# Altium PCB HW_V5.0.PcbDoc
Units mm, origin at the board's own origin, x right, y up, seen from the top; angles counter-clockwise.
Board outline 30 x 40 mm, 4 copper layers (Top Layer, Int1 (GND), MiddleLayer, Bottom Layer), stack 0.769 mm thick; 39 components, 33 nets, 221 pads, 86 vias.
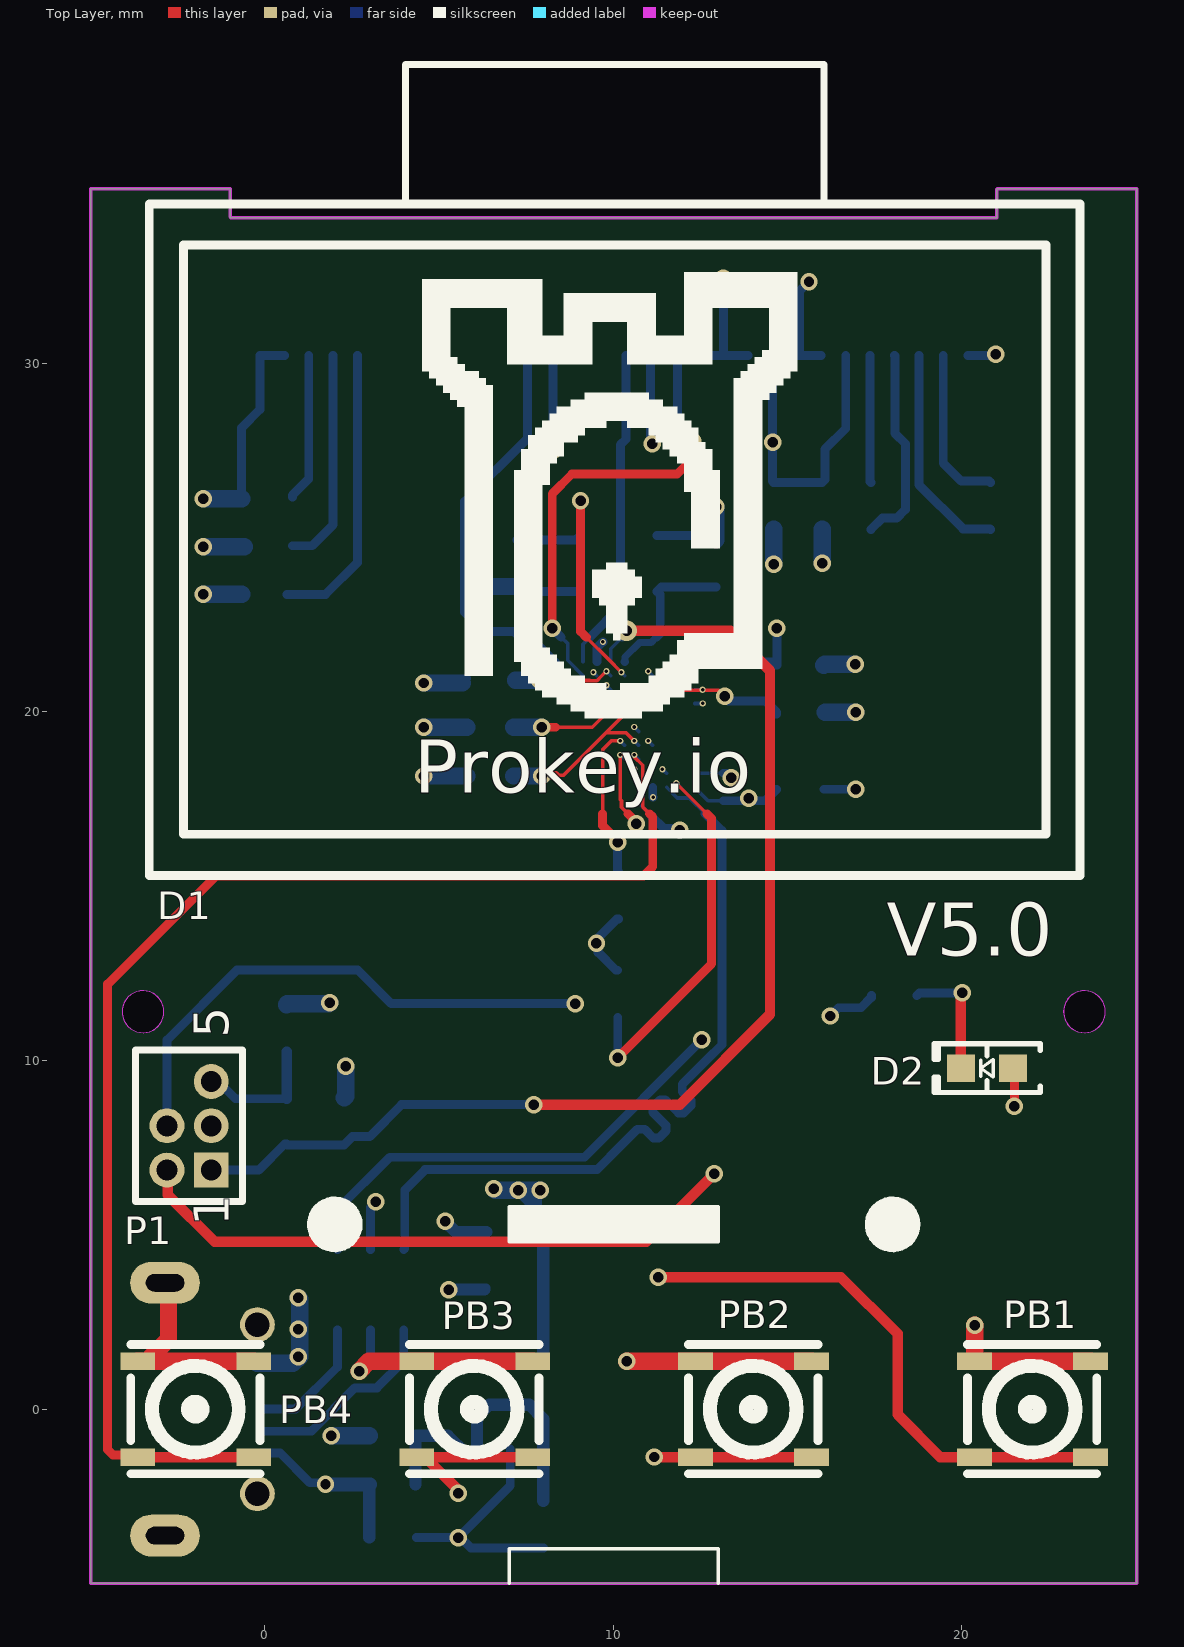
[diagram p0: Top Layer view]
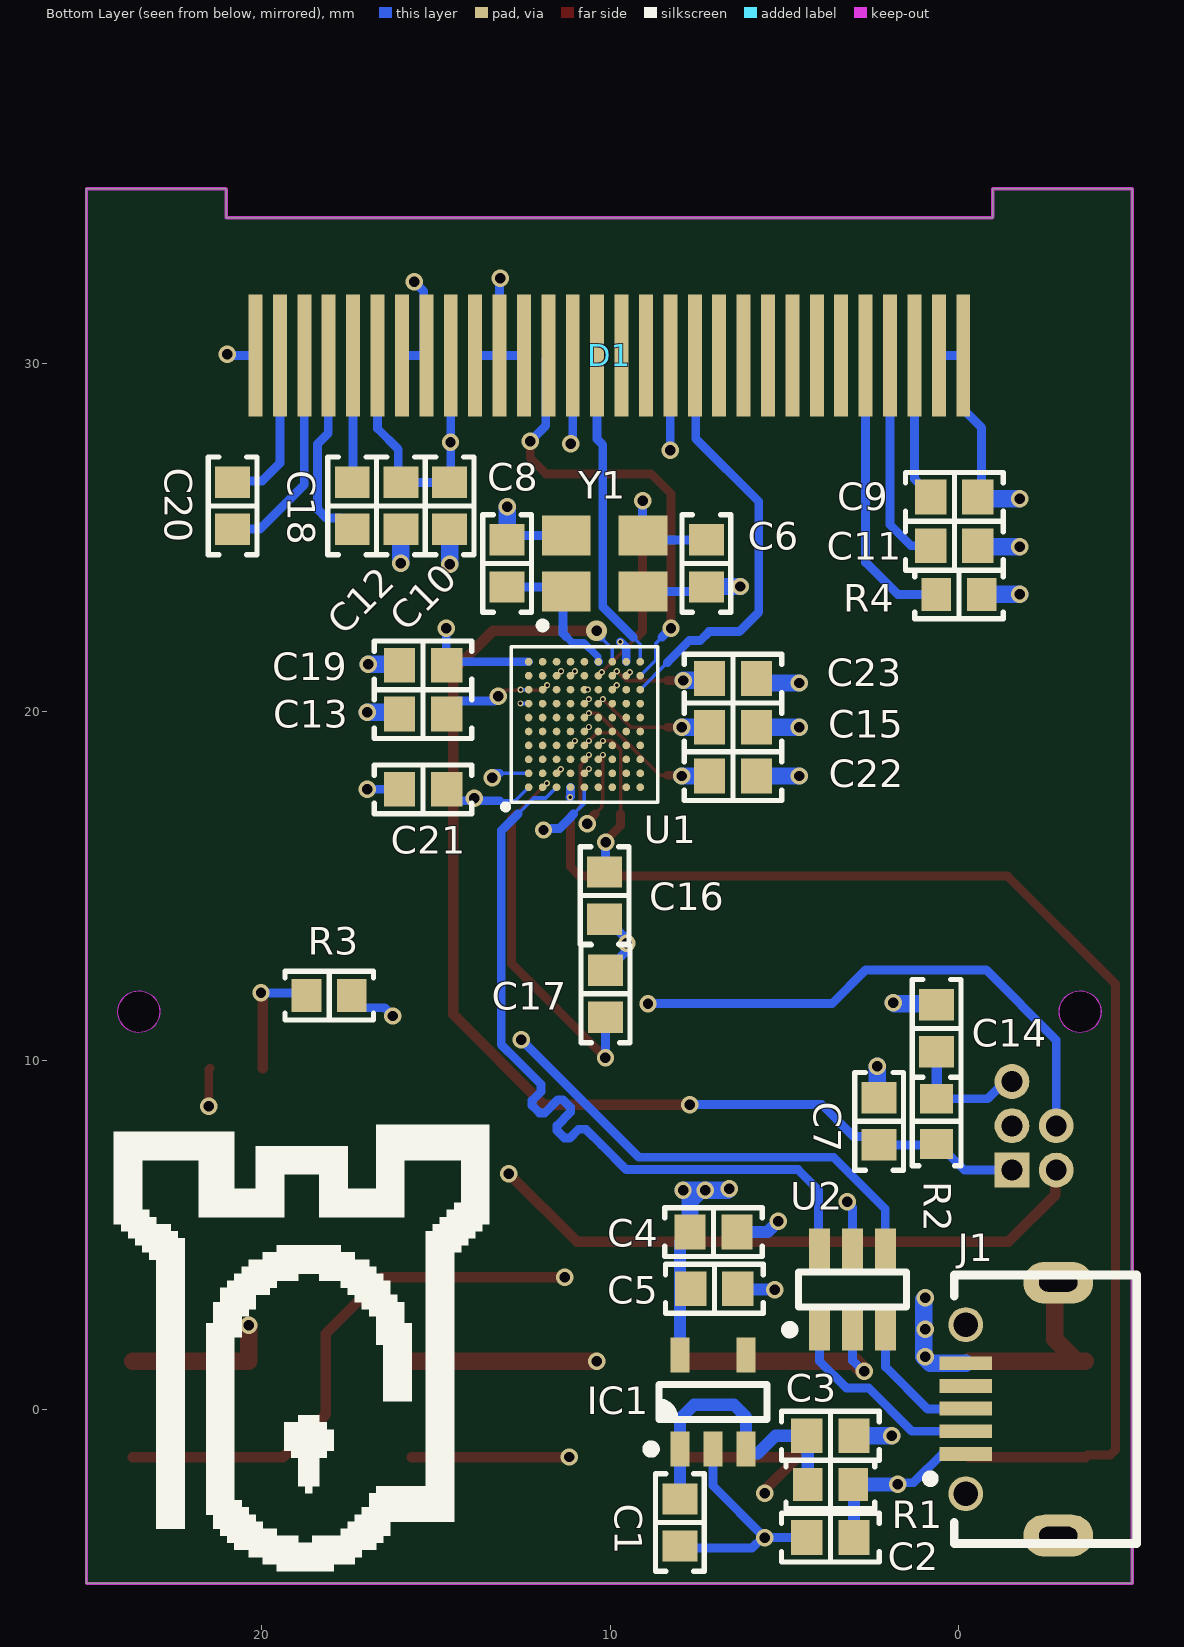
[diagram p1: Bottom Layer view, seen from below]
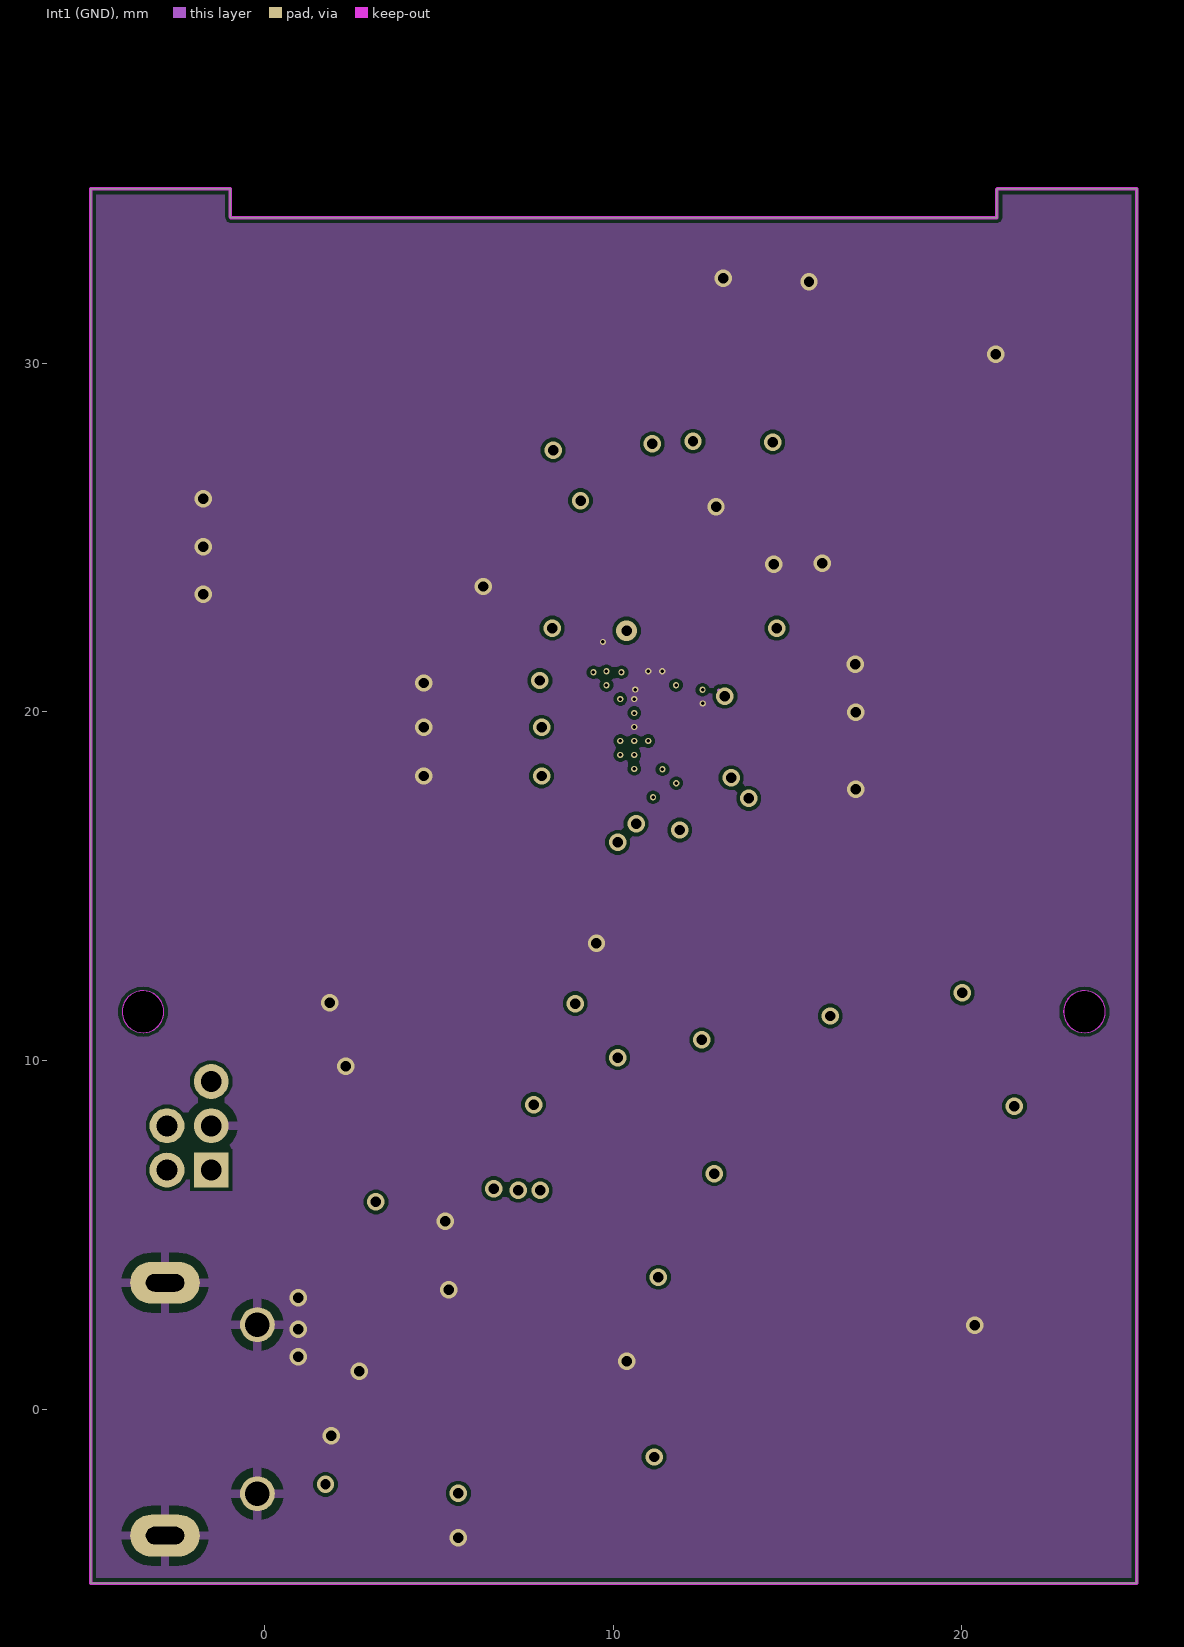
[diagram p2: Int1 (GND)]
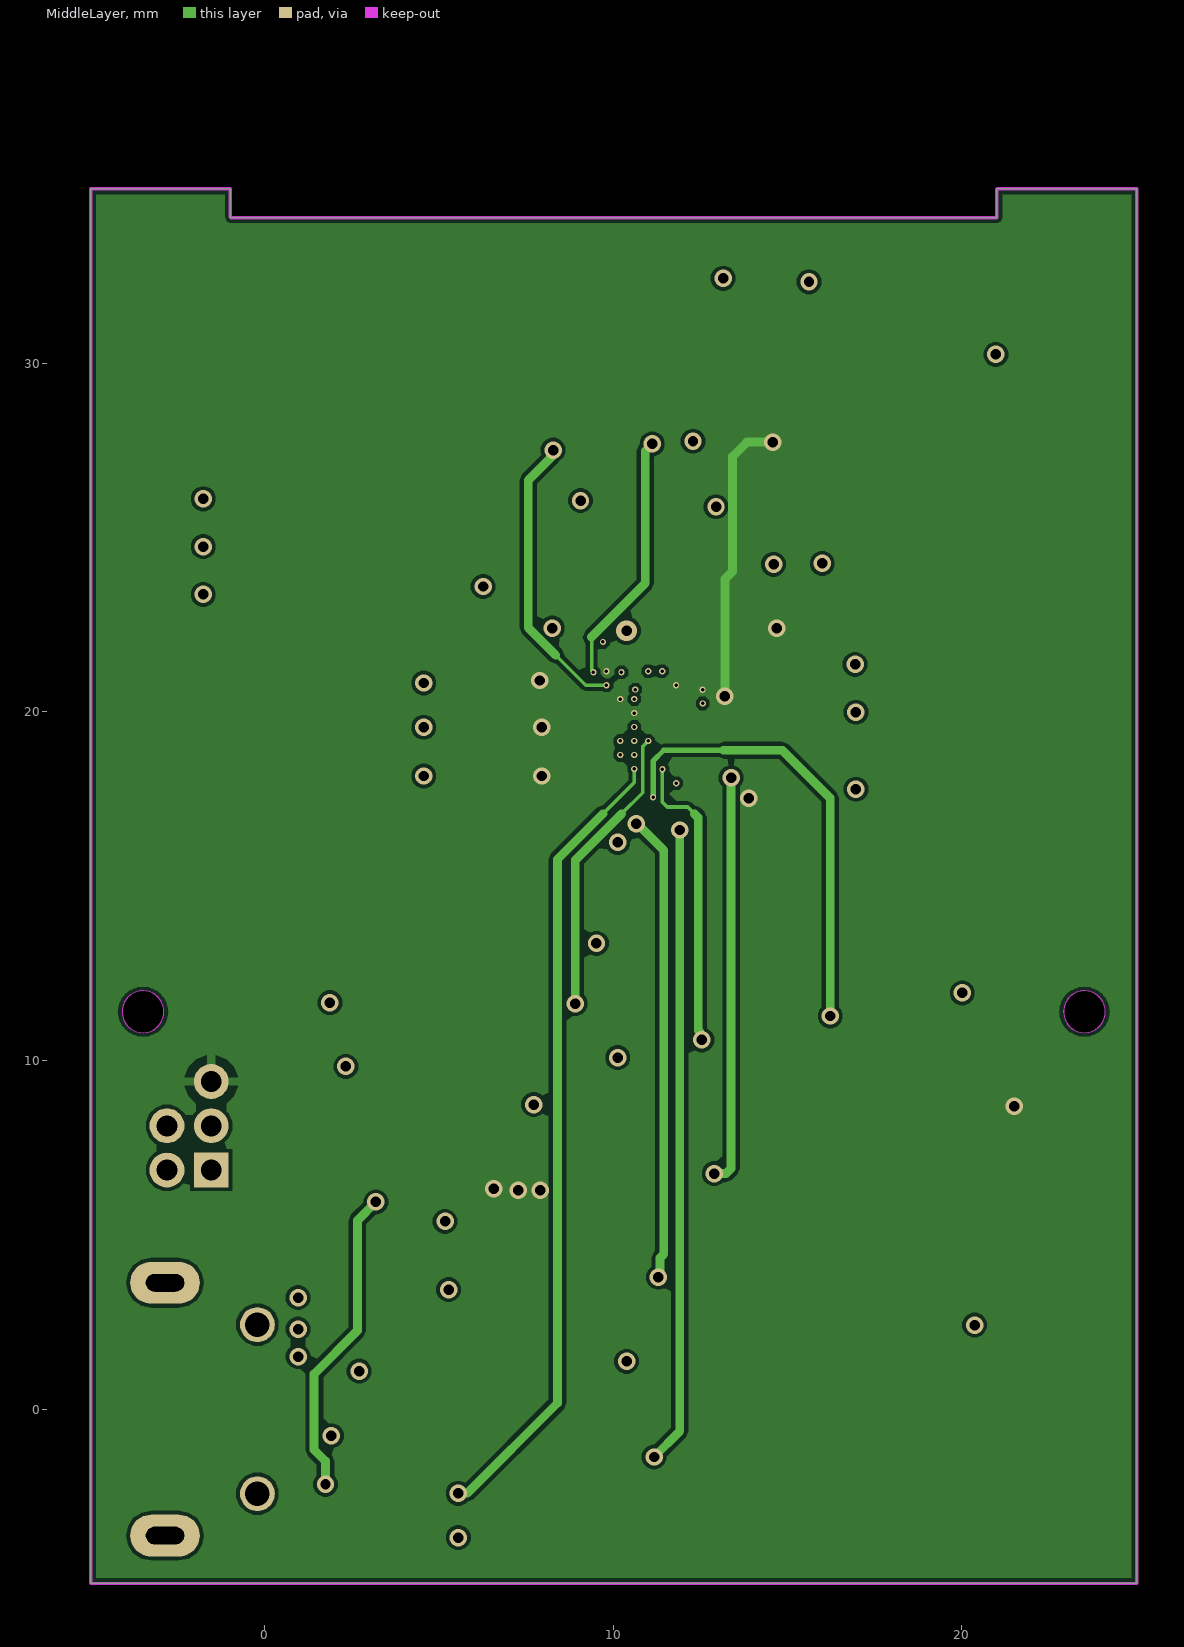
[diagram p3: MiddleLayer]
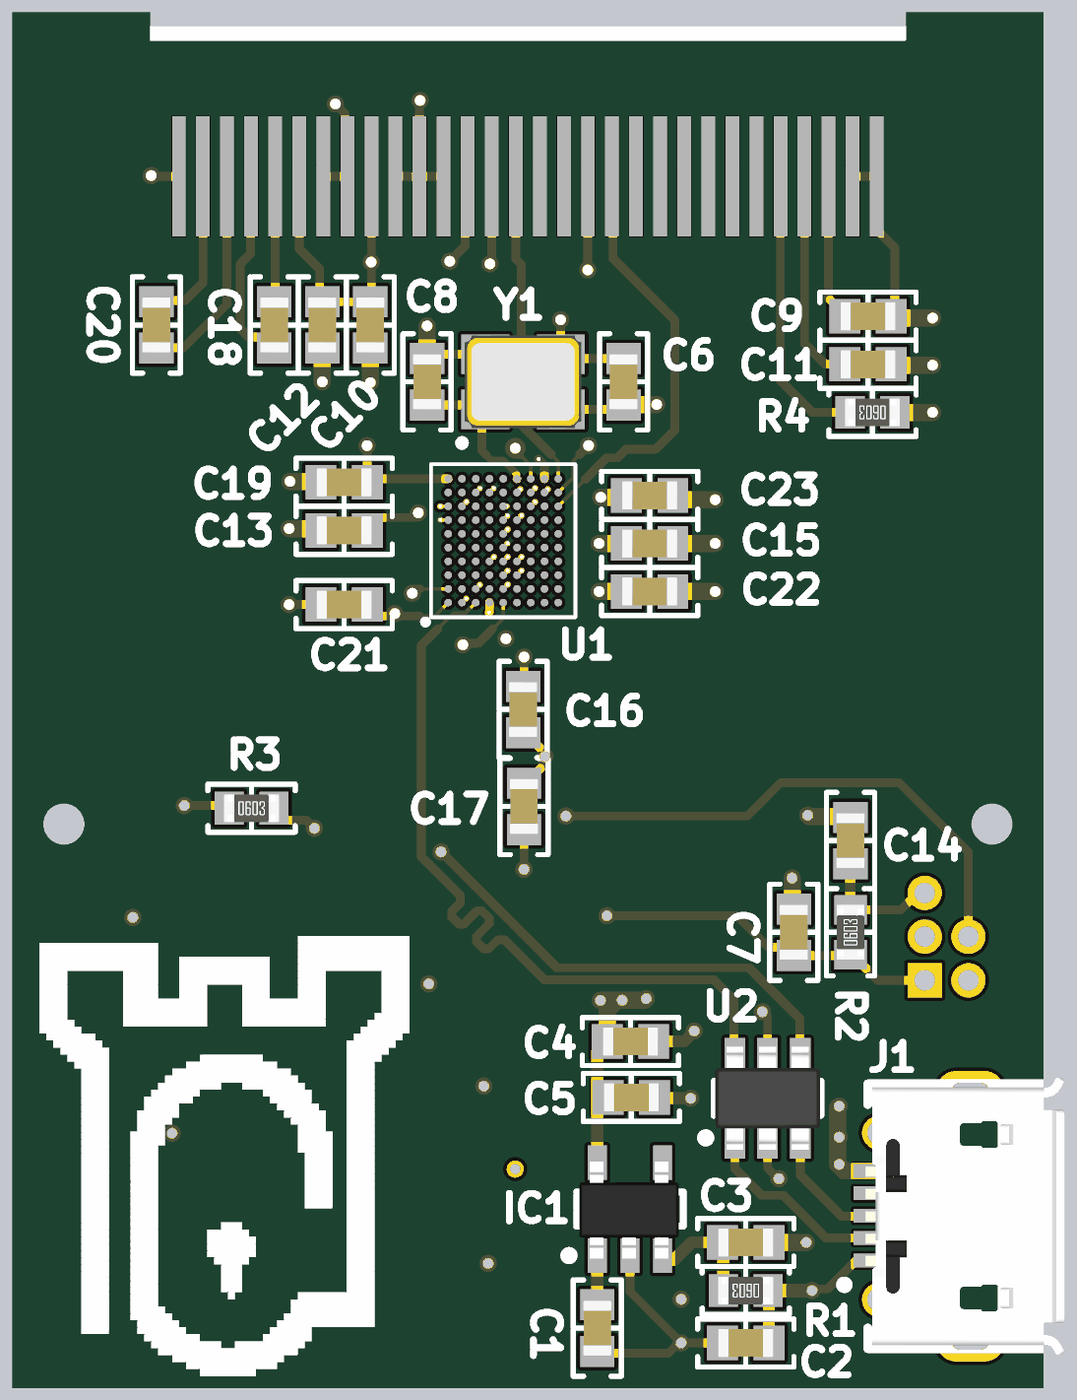
[diagram p4: 3D render of the assembled board from below, using the file's embedded part models]

## Layer stack, top to bottom
Top Solder: solder mask 0.0254, SM-001, Dk 4
Top Layer: signal copper 0.035
Dielectric 1: prepreg 0.1295, PP-017, Dk 4.3
Dielectric 2: prepreg 0.1295, PP-017, Dk 4.3
Int1 (GND): signal copper 0.035
Dielectric 3: core 0.1112, Core-039, Dk 4.8
MiddleLayer: signal copper 0.035
Dielectric 4: prepreg 0.1295, PP-017, Dk 4.3
Dielectric 5: prepreg 0.1295, PP-017, Dk 4.3
Bottom Layer: signal copper 0.035
Bottom Solder: solder mask 0.0254, SM-001, Dk 4

## Board outline
-0.98,34.195 -0.98,35 -4.98,35 -4.98,-5 25.02,-5 25.02,35 21.02,35 21.012,34.992 21.012,34.174 -0.959,34.174
cut-out: 22.92,11.4 ccw(c23.52,11.4) 23.52,10.8 ccw(c23.52,11.4) 24.12,11.4 ccw(c23.52,11.4) 23.52,12 ccw(c23.52,11.4)
cut-out: -4.08,11.4 ccw(c-3.48,11.4) -3.48,10.8 ccw(c-3.48,11.4) -2.88,11.4 ccw(c-3.48,11.4) -3.48,12 ccw(c-3.48,11.4)

## Design rules (kind name [scope] priority, off if disabled: settings)
Clearance BGA_Clearance [WithinRoom('BGA')] p1: gap=0.102 ignorepadtopadclearanceinfootprint=TRUE
Clearance [All] p2: gap=0.1 ignorepadtopadclearanceinfootprint=FALSE
FanoutControl Fanout_Default [All] p1: bgadir=NE bgaviamode=Closest fanoutstyle=Rows fanoutdirection=Alternating viagrid=0.025 // Fanout_Default (Default Rule)
HoleToHoleClearance [All] p1: gap=0.102 allowstackedmicrovias=TRUE
MinimumSolderMaskSliver [All] p1: minsoldermaskwidth=0
PlaneConnect [All] p1: pad.planeconnectstyle=Relief pad.reliefexpansion=0.508 pad.reliefentries=4 pad.reliefconductorwidth=0.254 pad.reliefairgap=0.254 via.planeconnectstyle=Direct via.reliefexpansion=0.508 via.reliefentries=4 via.reliefconductorwidth=0.254 via.reliefairgap=0.254
PolygonConnect [All] p1: thpad.connectstyle=Relief thpad.reliefconductorwidth=0.254 thpad.reliefentries=4 thpad.polygonreliefangle="90 Angle" thpad.airgapwidth=0.254 smdpad.connectstyle=Relief smdpad.reliefconductorwidth=0.254 smdpad.reliefentries=4 smdpad.polygonreliefangle="90 Angle" smdpad.airgapwidth=0.254 via.connectstyle=Direct via.reliefconductorwidth=0.254 via.reliefentries=4 via.polygonreliefangle="90 Angle" via.airgapwidth=0.254
RoomDefinition BGA [InComponentClass('Room Definition 1')] p1: confinementstyle=ConfineIn formatcopy=TRUE lockcomponents=FALSE outline 8.359,17.078 8.359,22.142 13.173,22.142 13.173,17.078
RoutingVias BGA_RoutingVias [WithinRoom('BGA')] p1: holewidth=0.102 width=0.178 viastyle="Through Hole" minholewidth=0.102 minwidth=0.178 maxholewidth=0.102 maxwidth=0.178
RoutingVias [All] p2: holewidth=0.5 width=1 viastyle="Through Hole" minholewidth=0.3 minwidth=0.5 maxholewidth=0.7 maxwidth=1.27
SilkToSilkClearance [All] p1: silktosilkclearance=0.05
SilkToSolderMaskClearance [IsPad] p1: minsilkscreentomaskgap=0.1 clearancetoexposedcopper=TRUE
SolderMaskExpansion [All] p1: expansion=0.102 istentingtop=FALSE
Width BGA_Width [WithinRoom('BGA')] p1: maxlimit=0.254 minlimit=0.102 preferedwidth=0.102
Width [All] p2: maxlimit=1.016 minlimit=0.254 preferedwidth=0.254
20 further rules are at their usual default settings.

## Components (designator, comment, footprint, x,y, rotation, side; value= is the part's Value field where it differs from the comment)
C1 "10uF" "CAP 0603/1608" 8.001,-3.251 r90 bottom
C2 "0.1uF" "CAP 0603/1608" 3.683,-3.683 r180 bottom
C3 "0.1uF" "CAP 0603/1608" 3.683,-0.762 r0 bottom
C4 "10uF" "CAP 0603/1608" 7.036,5.08 r0 bottom
C5 "0.1uF" "CAP 0603/1608" 7.01,3.454 r0 bottom
C6 "20pF" "CAP 0603/1608" 7.239,24.257 r90 bottom
C7 "0.1uF" "CAP 0603/1608" 2.286,8.255 r270 bottom
C8 "20pF" "CAP 0603/1608" 12.954,24.257 r270 bottom
C9 "2.2uF" "CAP 0603/1608" 0.127,26.162 r180 bottom
C10 "1uF" "CAP 0603/1608" 14.605,25.908 r90 bottom
C11 "4.7uF" "CAP 0603/1608" 0.127,24.765 r0 bottom
C12 "1uF" "CAP 0603/1608" 16.002,25.908 r270 bottom
C13 "0.1uF" "CAP 0603/1608" 15.367,19.939 r180 bottom
C14 "0.1uF" "CAP 0603/1608" 0.635,10.922 r270 bottom
C15 "0.1uF" "CAP 0603/1608" 6.477,19.558 r0 bottom
C16 "2.2uF" "CAP 0603/1608" 10.16,14.732 r90 bottom
C17 "2.2uF" "CAP 0603/1608" 10.135,11.913 r270 bottom
C18 "1uF" "CAP 0603/1608" 17.399,25.908 r90 bottom
C19 "0.1uF" "CAP 0603/1608" 15.367,21.336 r180 bottom
C20 "1uF" "CAP 0603/1608" 20.828,25.908 r270 bottom
C21 "0.1uF" "CAP 0603/1608" 15.367,17.78 r180 bottom
C22 "0.1uF" "CAP 0603/1608" 6.477,18.161 r0 bottom
C23 "0.1uF" "CAP 0603/1608" 6.477,20.955 r0 bottom
D1 "DLC0096DLOG-B" PMOLED_0096_TOP_CONB 23.358,34.544 r180 top locked
D2 "Red" "LED 0603/1608 RED" 20.726,9.779 r180 top value=Green
IC1 "TPS76333DBVT" "TI SOT-23-5 DBV" 7.051,0.207 r90 bottom
J1 "U-F-M5DD-W-L" U-F-M5DD-W-L -1.525,0 r0 bottom
P1 "MHDR2X3" MHDR2X3 -1.524,6.858 r90 top
PB1 "Tactile Switch 3.7 x 3.7" SW_375_375_4PIN 22.02,0 r90 top locked
PB2 "Tactile Switch 3.7 x 3.7" SW_375_375_4PIN 14.02,0 r90 top locked
PB3 "Tactile Switch 3.7 x 3.7" SW_375_375_4PIN 6.02,0 r90 top locked
PB4 "Tactile Switch 3.7 x 3.7" SW_375_375_4PIN -1.98,0 r90 top locked
R1 "1R" "RES 0603/1608" 3.683,-2.159 r0 bottom
R2 "1K" "RES 0603/1608" 0.635,8.255 r90 bottom
R3 "330R" "RES 0603/1608" 18.059,11.862 r180 bottom
R4 "910K" "RES 0603/1608" -0.003,23.368 r0 bottom
U1 "STM32F405OGY" STM-WLCSP90 10.738,19.638 r90 bottom
U2 "USBLC6-SC6" "ST SOT-23-6" 3.048,3.429 r90 bottom
Y1 "8MHz" WE-XTAL_CFPX-180 10.16,24.257 r180 bottom

## Footprints (in the part's own frame and the unit in brackets; to place one, negate y for a bottom-side part, rotate by r counter-clockwise, add the part's x,y. Pads: shape width x height; smd on the part's side, far side on the other; paste and mask are expansions set on the pad)
"CAP 0603/1608" [mm] "Chip Capacitor, 2-Leads, Body 1.60x0.80mm, IPC Medium Density"
  rect 0.9x1 smd: 1(-0.675,0) 2(0.675,0)
  silkscreen extent -1.4,-0.7 1.4,0.7, body extent -0.8,-0.41 0.8,0.41, height 0.82
"LED 0603/1608 RED" [mm] "Chip Diode, 2-Leads, Body 1.60x0.80mm, IPC Medium Density"
  rect 0.8x0.8 smd: 1(-0.75,0) 2(0.75,0)
  silkscreen extent -1.52,-0.7 1.52,0.7, body extent -0.8,-0.4 0.8,0.4, height 0.53
MHDR2X3 [mm] "Connector; Header; 3x2 Position"
  rect 1x1 hole 0.6: 1(0,0)
  round 1 hole 0.6: 2(0,1.27) 3(1.27,0) 4(1.27,1.27) 5(2.54,0)
  silkscreen extent -0.9,-0.9 3.44,2.17
PMOLED_0096_TOP_CONB [mm]
  rect 0.4x3.5 smd far side paste+0 mask+0.02: 1(3.185,4.318) 2(3.885,4.318) 3(4.585,4.318) 4(5.285,4.318) 5(5.985,4.318) 6(6.685,4.318) 7(7.385,4.318) 8(8.085,4.318) 9(8.785,4.318) 10(9.485,4.318) 11(10.185,4.318) 12(10.885,4.318) 13(11.585,4.318) 14(12.285,4.318) 15(12.985,4.318) 16(13.685,4.318) 17(14.385,4.318) 18(15.085,4.318) 19(15.785,4.318) 20(16.485,4.318) 21(17.185,4.318) 22(17.885,4.318) 23(18.585,4.318) 24(19.285,4.318) 25(19.985,4.318) 26(20.685,4.318) 27(21.385,4.318) 28(22.085,4.318) 29(22.785,4.318) 30(23.485,4.318)
  silkscreen extent -0.04,-4.02 26.66,19.24, body extent -0.08,-0.05 26.62,19.21, height 1.6
"RES 0603/1608" [mm] "Chip Resistor, 2-Leads, Body 1.60x0.80mm, IPC Medium Density"
  rect 0.85x0.95 smd: 1(-0.65,0) 2(0.65,0)
  silkscreen extent -1.27,-0.7 1.27,0.7, body extent -0.8,-0.4 0.8,0.4, height 0.45
"ST SOT-23-6" [mm] "SOT23, 6-Leads, Body 2.93x2.80mm, Pitch 0.95mm, IPC Medium Density"
  rect 1.2x0.6 smd: 1(-1.15,0.95) 2(-1.15,0) 3(-1.15,-0.95) 4(1.15,-0.95) 5(1.15,0) 6(1.15,0.95)
  silkscreen extent -1.27,-1.55 0.5,1.93, body extent -1.5,-1.53 1.5,1.52, height 1.45
STM-WLCSP90 [mm] "BGA, 90-Leads, Body 3.97x4.22mm, Pitch 0.4mm"
  round 0.22 smd: A1(-1.8,1.6) A2(-1.4,1.6) A3(-1,1.6) A4(-0.6,1.6) A5(-0.2,1.6) A6(0.2,1.6) A7(0.6,1.6) A8(1,1.6) A9(1.4,1.6) A10(1.8,1.6) B1(-1.8,1.2) B2(-1.4,1.2) B3(-1,1.2) B4(-0.6,1.2) B5(-0.2,1.2) B6(0.2,1.2) B7(0.6,1.2) B8(1,1.2) B9(1.4,1.2) B10(1.8,1.2) C1(-1.8,0.8) C2(-1.4,0.8) C3(-1,0.8) C4(-0.6,0.8) C5(-0.2,0.8) C6(0.2,0.8) C7(0.6,0.8) C8(1,0.8) C9(1.4,0.8) C10(1.8,0.8) D1(-1.8,0.4) D2(-1.4,0.4) D3(-1,0.4) D4(-0.6,0.4) D5(-0.2,0.4) D6(0.2,0.4) D7(0.6,0.4) D8(1,0.4) D9(1.4,0.4) D10(1.8,0.4) E1(-1.8,0) E2(-1.4,0) E3(-1,0) E4(-0.6,0) E5(-0.2,0) E6(0.2,0) E7(0.6,0) E8(1,0) E9(1.4,0) E10(1.8,0) F1(-1.8,-0.4) F2(-1.4,-0.4) F3(-1,-0.4) F4(-0.6,-0.4) F5(-0.2,-0.4) F6(0.2,-0.4) F7(0.6,-0.4) F8(1,-0.4) F9(1.4,-0.4) F10(1.8,-0.4) G1(-1.8,-0.8) G2(-1.4,-0.8) G3(-1,-0.8) G4(-0.6,-0.8) G5(-0.2,-0.8) G6(0.2,-0.8) G7(0.6,-0.8) G8(1,-0.8) G9(1.4,-0.8) G10(1.8,-0.8) H1(-1.8,-1.2) H2(-1.4,-1.2) H3(-1,-1.2) H4(-0.6,-1.2) H5(-0.2,-1.2) H6(0.2,-1.2) H7(0.6,-1.2) H8(1,-1.2) H9(1.4,-1.2) H10(1.8,-1.2) J1(-1.8,-1.6) J2(-1.4,-1.6) J3(-1,-1.6) J4(-0.6,-1.6) J5(-0.2,-1.6) J6(0.2,-1.6) J7(0.6,-1.6) J8(1,-1.6) J9(1.4,-1.6) J10(1.8,-1.6)
  silkscreen extent -2.44,-2.1 2.23,2.34, body extent -2.11,-1.98 2.11,1.98, height 0.62
SW_375_375_4PIN [mm]
  rect 0.5x1 smd: 1(1.372,1.651) 2(-1.375,1.651) 3(-1.375,-1.676) 4(1.372,-1.676)
  silkscreen extent -1.85,-1.85 1.85,1.85
"TI SOT-23-5 DBV" [mm] "SOT23, 5-Leads, Body 2.90x2.80mm, Pitch 0.95mm, IPC Medium Density"
  rect 1x0.55 smd: 1(-1.35,0.95) 2(-1.35,0) 3(-1.35,-0.95) 4(1.35,-0.95) 5(1.35,0.95)
  silkscreen extent -1.47,-1.55 0.5,1.9, body extent -1.44,-1.42 1.39,1.48, height 1.5
U-F-M5DD-W-L [mm]
  rect 1.5x0.4 smd paste+0 mask+0.076: 1(1.325,1.283) 2(1.325,0.633) 3(1.325,-0.017) 4(1.325,-0.667) 5(1.325,-1.317)
  oval 2x1.2 hole 0.5 slot 1.1 at 0 deg: 6(-1.325,-3.625) 6(-1.325,3.625)
  round 1 hole 0.7: 6(1.325,-2.425) 6(1.325,2.425)
  silkscreen extent -3.58,-3.85 2.45,3.85, body extent -4.08,-4.02 1.72,4.03, height 2.72
WE-XTAL_CFPX-180 [mm] "Quartz Crystal, size CFPX-180, body 3.4x2.7mm"
  rect 1.4x1.15 smd: 1(-1.1,-0.8) 2(1.1,-0.8) 3(1.1,0.8) 4(-1.1,0.8)
  silkscreen extent -1.88,-1.88 -1.68,-1.68, body extent -1.7,-1.35 1.7,1.35, height 0.65

## Part data
C1 C4: library part CL10A106MQ8NNNC, "CAP CER 10UF 6.3V X5R 0603", Device Package="0603 (1608 Metric)", Manufacturer="Samsung Electro-Mechanics America, Inc.", Supplier Part Number 1=1276-1119-2-ND, TemperatureCoefficient=X5R, TemperatureRange="-55C ~ 85C", Tolerance=20%, Voltage=6.3V, ComponentLink1Description=Datasheet, ComponentLink1URL=http://www.samsungsem.com/kr/support/product-search/mlcc/CL10A106MQ8NNNC.jsp, ComponentLink2Description="Digi-Key Listing", ComponentLink2URL=https://www.digikey.com/product-detail/en/samsung-electro-mechanics-america-inc/CL10A106MQ8NNNC/1276-1119-2-ND/3886777, Part Number=CL10A106MQ8NNNC, PartId=13031, Price=0.0274, Supplier 1=Digi-Key
C2 C3 C5 C7 C13 C14 C15 C19 C21 C22 C23: library part CL10B104JO8NNNC, "CAP CER 0.1UF 16V X7R 0603", Device Package="0603 (1608 Metric)", Manufacturer="Samsung Electro-Mechanics America, Inc.", Supplier Part Number 1=1276-1061-2-ND, TemperatureCoefficient=X7R, TemperatureRange="-55C ~ 125C", Tolerance=5%, Voltage=16V, ComponentLink1Description=Datasheet, ComponentLink1URL=http://www.samsungsem.com/kr/support/product-search/mlcc/CL10B104JO8NNNC.jsp, ComponentLink2Description="Digi-Key listing", ComponentLink2URL=http://digikey.com/product-detail/en/CL10B104JO8NNNC/1276-1061-2-ND/3886719, Part Number=CL10B104JO8NNNC, PartId=5417, Price=0.0132, Supplier 1=Digi-Key, Type=-
C6 C8: library part CL10C200JB8NNNC, "CAP CER 20PF 50V NP0 0603", Device Package="0603 (1608 Metric)", Manufacturer="Samsung Electro-Mechanics America, Inc.", Supplier Part Number 1=1276-1187-2-ND, TemperatureCoefficient="C0G, NP0", TemperatureRange="-55C ~ 125C", Tolerance=5%, Voltage=50V, ComponentLink1Description=Datasheet, ComponentLink1URL=http://www.samsungsem.com/kr/support/product-search/mlcc/CL10C200JB8NNNC.jsp, ComponentLink2Description="Digi-Key listing", ComponentLink2URL=http://digikey.com/product-detail/en/CL10C200JB8NNNC/1276-1187-2-ND/3886845, Part Number=CL10C200JB8NNNC, PartId=5318, Price=0.0085, Supplier 1=Digi-Key, Type=-
C9 C16 C17: library part CL10A225KO5LNNC, "CAP CER 2.2UF 16V X5R 0603", Device Package="0603 (1608 Metric)", Manufacturer="Samsung Electro-Mechanics", Supplier Part Number 1=1276-1880-2-ND, TemperatureCoefficient=X5R, TemperatureRange="-55C ~ 85C", Tolerance=10%, Voltage=16V, ComponentLink1Description=Datasheet, ComponentLink1URL=http://www.samsungsem.com/kr/support/product-search/mlcc/CL10A225KO5LNNC.jsp, ComponentLink2Description="Digi-Key Listing", ComponentLink2URL=https://www.digikey.com/product-detail/en/samsung-electro-mechanics/CL10A225KO5LNNC/1276-1880-2-ND/3887538, Part Number=CL10A225KO5LNNC, PartId=30554, Price=0, Supplier 1=Digi-Key
C10 C12: library part CL10A105KO8NNNC, "CAP CER 1UF 16V X5R 0603", Device Package="0603 (1608 Metric)", Manufacturer="Samsung Electro-Mechanics America, Inc.", Supplier Part Number 1=1276-1034-2-ND, TemperatureCoefficient=X5R, TemperatureRange="-55C ~ 85C", Tolerance=10%, Voltage=16V, ComponentLink1Description=Datasheet, ComponentLink1URL=http://www.samsungsem.com/kr/support/product-search/mlcc/CL10A105KO8NNNC.jsp, ComponentLink2Description="Digi-Key Listing", ComponentLink2URL=https://www.digikey.com/product-detail/en/samsung-electro-mechanics-america-inc/CL10A105KO8NNNC/1276-1034-2-ND/3886692, Part Number=CL10A105KO8NNNC, PartId=13125, Price=0.0072, Supplier 1=Digi-Key
C11: library part CL10A475KO8NNNC, "CAP CER 4.7UF 16V X5R 0603", Device Package="0603 (1608 Metric)", Manufacturer="Samsung Electro-Mechanics America, Inc.", Supplier Part Number 1=1276-1784-2-ND, TemperatureCoefficient=X5R, TemperatureRange="-55C ~ 85C", Tolerance=10%, Voltage=16V, ComponentLink1Description=Datasheet, ComponentLink1URL=http://www.samsungsem.com/kr/support/product-search/mlcc/CL10A475KO8NNNC.jsp, ComponentLink2Description="Digi-Key Listing", ComponentLink2URL=https://www.digikey.com/product-detail/en/samsung-electro-mechanics-america-inc/CL10A475KO8NNNC/1276-1784-2-ND/3887442, Part Number=CL10A475KO8NNNC, PartId=13180, Price=0.0499, Supplier 1=Digi-Key
C18 C20: library part CL10A105KA8NNNC, "CAP CER 1UF 25V X5R 0603", Device Package="0603 (1608 Metric)", Manufacturer="Samsung Electro-Mechanics America, Inc.", Supplier Part Number 1=1276-1102-2-ND, TemperatureCoefficient=X5R, TemperatureRange="-55C ~ 85C", Tolerance=10%, Voltage=25V, ComponentLink1Description=Datasheet, ComponentLink1URL=http://www.samsungsem.com/kr/support/product-search/mlcc/CL10A105KA8NNNC.jsp, ComponentLink2Description="Digi-Key Listing", ComponentLink2URL=https://www.digikey.com/product-detail/en/samsung-electro-mechanics-america-inc/CL10A105KA8NNNC/1276-1102-2-ND/3886760, Part Number=CL10A105KA8NNNC, PartId=13209, Price=0.0082, Supplier 1=Digi-Key
D2: library part LTST-C191KRKT, "LED RED CLEAR 0603 SMD", Current (Test)=20mA, Device Package="0603 (1608 Metric)", Manufacturer="Lite-On Inc.", Supplier Part Number 1=160-1447-2-ND, Voltage Forward=2V, Colour=Red, ComponentLink1Description=Datasheet, ComponentLink1URL=http://optoelectronics.liteon.com/upload/download/DS22-2000-223/S_110_LTST-C191KRKT.pdf, ComponentLink2Description="Digi-Key Listing", ComponentLink2URL=http://www.digikey.ca/product-detail/en/LTST-C191KRKT/160-1447-2-ND/386837, Lens Transparency=Clear, Millicandela=54mcd, Part Number=LTST-C191KRKT, PartId=7050, Price=0.0521, Supplier 1=Digi-Key, Viewing Angle=130
IC1: "IC REG LDO 3.3V 0.15A SOT23-5", Current - Limit (Min)=500mA, Device Package="SC-74A, SOT-753", Manufacturer="Texas Instruments", Operating Temperature="-40C ~ 125C", Supplier Part Number 1=296-2705-2-ND, Voltage - Input="Up to 10V", Voltage - Output=3.3V, Voltage Dropout="0.3V @ 150mA", ComponentLink1Description=Datasheet, ComponentLink1URL=http://www.ti.com/lit/ds/symlink/tps763.pdf, ComponentLink2Description="Digi-Key Listing", ComponentLink2URL=http://www.digikey.ca/product-detail/en/TPS76333DBVT/296-2705-2-ND/306578, Part Number=TPS76333DBVT, PartId=7953, Price=0.8764, Supplier 1=Digi-Key, Topology="Positive Fixed"
J1: "USB - Micro B Female USB 2 5 5.06*7.59mm USB Connectors", Part Number=U-F-M5DD-W-L
P1: "Header, 3-Pin, Dual row", LatestRevisionDate=17-Jul-2002, LatestRevisionNote="Re-released for DXP Platform.", Publisher="Altium Limited"
R1: library part 0603S8J010J, "RES SMD 1R OHM 5% 1/8W 0603", Device Package="1608 (0603 Metric)", Manufacturer=Uniohm, PowerRating="0.125W, 1/8W", TemperatureCoefficient=100ppm/C, TemperatureRange="-55C ~ 155C", Tolerance=5%, Part Number=0603S8J010J, Price=0.0089
R2: library part 0603S8J0102, "RES SMD 1K OHM 5% 1/8W 0603", Device Package="1608 (0603 Metric)", Manufacturer=Uniohm, PowerRating="0.125W, 1/8W", TemperatureCoefficient=100ppm/C, TemperatureRange="-55C ~ 155C", Tolerance=5%, Part Number=0603S8J0102, Price=0.0089
R3: library part 0603S8J0331, "RES SMD 330R OHM 5% 1/8W 0603", Device Package="1608 (0603 Metric)", Manufacturer=Uniohm, PowerRating="0.125W, 1/8W", TemperatureCoefficient=100ppm/C, TemperatureRange="-55C ~ 155C", Tolerance=5%, Part Number=0603S8J0331, Price=0.0089
R4: library part 0603S8J0914, "RES SMD 910K OHM 5% 1/8W 0603", Device Package="1608 (0603 Metric)", Manufacturer=Uniohm, PowerRating="0.125W, 1/8W", TemperatureCoefficient=100ppm/C, TemperatureRange="-55C ~ 155C", Tolerance=5%, Part Number=0603S8J0914, Price=0.0089
U1: library part STM32F405OGY6, "ARM® Cortex®-M4 series Microcontroller IC 32-Bit 168MHz 1MB (1M x 8) FLASH 90-WLCSP (4.22x3.97)", I/Os (High Current)=72, Manufacturer=STMicroelectronics, Operating Frequency(F) (Processor speed) (MHz)=168, Supplier Part Number 1=497-17431-1-ND, ComponentLink1Description="Manufacturer URL", ComponentLink1URL=https://www.st.com/content/st_com/en/products/microcontrollers-microprocessors/stm32-32-bit-arm-cortex-mcus/stm32-high-performance-mcus/stm32f4-series/stm32f405-415/stm32f405og.html, Core="ARM Cortex-M4", FLASH Size (Prog) (kB)=1024, Internal RAM Size (kB)=192, Part Number=STM32F405OGY, Supplier 1=Digi-Key, Supplier 2=Newark, Supplier Part Number 2=66W7295
U2: library part USBLC6-2, "TVS DIODE 5.25V 17V SOT23-6", Device Package=SOT-23-6, Manufacturer=STMicroelectronics, Operating Temperature="-40°C ~ 125°C (TJ)", Supplier Part Number 1=26M4748, Part Number=USBLC6-SC6, Supplier 1=Newark, Supplier 2=Digi-Key, Supplier Part Number 2=497-11883-1-ND
Y1: library part 830108313809, "WE-XTAL Quartz Crystal, SMT, CFPX-180, 8MHz, +/-30ppm", Frequency Stability=+/-50ppm, Frequency Tolerance=+/-30ppm, Load Capacitance=12pF, Manufacturer="Wurth Elektronik", Operating Temperature="-40 to +85degC", ComponentLink1Description=Manufacturer, ComponentLink1URL=http://www.we-online.de, ComponentLink2Description=Datasheet, ComponentLink2URL=https://www.we-online.com/catalog/datasheet/830108313809.pdf, Frequency=8MHz, Manufacturer Part Number=830108313809, Mounting Technology=SMT, Packaging="Tape and Reel", Published Date="November 2020", Size=CFPX-180
D1: Part Number=DLC0096DLOG-B

## Via types
v1: diameter 0.5, hole 0.3, Top Layer to Bottom Layer, tented both sides, 60 vias
v2: diameter 0.178, hole 0.102, Top Layer to Bottom Layer, 17 vias
v3: diameter 0.178, hole 0.102, Top Layer to Bottom Layer, tented both sides, 7 vias
v4: diameter 0.5, hole 0.3, Top Layer to Bottom Layer, 1 vias
v5: diameter 0.6, hole 0.3, Top Layer to Bottom Layer, tented both sides, 1 vias

## Nets (pads, with @x,y where several pads share a name; then routed paths per layer and width w, separated by ;. In a path a pad name is that pad's centre, name@x,y a point inside that pad or via, vN(x,y) a via of type N, cw(c..) or ccw(c..) an arc to the next point about the centre after c; other vN are vias at no path point)
3V3: C4.2 C5.2 C10.2 C12.1 C13.2 C14.2 C15.2 C19.2 C21.2 C22.2 C23.2 D1.6 D1.9 D2.1 IC1.5 P1.5 R2.2 U1.A1 U1.A8 U1.A10 U1.B8 U1.E4 U1.E6 U1.F7 U1.G9 | length 49.9
  Top Layer w0.102: 8.359,18.182 8.581,18.182 9.806,19.407 ; 8.359,19.558 9.402,19.558 v2(10.21,20.366) ; 8.359,20.9 9.333,20.9 9.339,20.895 9.539,20.895 9.68,21.036 v2(9.81,21.166) ; v2(10.61,19.166) 10.368,19.407 9.806,19.407 ; v2(10.61,19.966) 10.365,19.966 9.806,19.407 ; v2@11.83,20.766 11.971,20.625 13.03,20.625
  Top Layer w0.254: P1.5 P1.5@-1.499,9.423 ; v1(7.9,20.9) 8.359,20.9 ; v1(7.95,19.558) 8.359,19.558 ; v1@7.972,18.182 8.359,18.182 ; D2.1 21.514,9.742 v1(21.514,8.687)
  Int1 (GND) w0.102: v2(11.81,20.766) v2@11.83,20.766 ; 13.03,20.625 v1@13.173,20.482
  Int1 (GND) w0.254: v1(7.95,18.161) v1@7.972,18.182 ; v1@13.173,20.482 v1(13.208,20.447)
  MiddleLayer w0.254: v1(13.208,20.447) 13.208,23.808 13.431,24.031 13.431,27.325 13.843,27.737 v1(14.58,27.737)
  Bottom Layer w0.102: v2(9.81,21.166) U1.G9 ; v2(10.21,20.366) U1.F7 ; v2(10.61,19.166) U1.E4 ; v2(11.81,20.766) U1.B8 ; U1.A1 12.726,17.45 13.173,17.45 ; U1.A8 12.34,20.636 12.567,20.636 v2(12.569,20.634)
  Bottom Layer w0.254: P1.5 -1.322,9.398 -0.829,8.905 R2.2 ; v1(6.579,6.325) v1@6.624,6.279 ; C23.2 C23.2@7.203,20.904 ; C4.2 C4.2@8.001,4.79 ; v1(7.91,6.276) v1@7.913,6.279 ; U1.A10 14.59,21.438 C19.2 14.7,21.344 v1(14.7,22.4) ; 13.173,17.45 14.369,17.45 14.692,17.773 C21.2 ; v1@13.316,20.312 14.369,20.312 14.692,19.989 C13.2 ; D1.9 14.573,26.615 C10.2 C12.1 16.078,26.659 16.078,27.534 16.673,28.128 D1.6
  Bottom Layer w0.3: R2.2 C14.2
  Bottom Layer w0.35: IC1.5 C4.2@8.001,4.79
  Bottom Layer w0.5: v1@6.624,6.279 v1(7.277,6.279) 7.411,6.279 v1@7.414,6.276 ; C22.2 v1(7.95,18.161) ; C15.2 v1(7.95,19.558) ; C23.2@7.203,20.904 v1@7.9,20.904 ; C4.2 7.711,5.98 v1@7.414,6.276 ; v1(7.91,6.276) v1@7.414,6.276
  other v1: 13.892,17.518
+5: C1.2 C3.2 IC1.1 IC1.3 R1.2 | length 8.9
  Bottom Layer w0.254: C3.2@4.333,-0.787 C3.2 ; IC1.3@5.975,-1.269 IC1.3
  Bottom Layer w0.35: R1.2 C3.2@4.333,-0.787 ; C3.2 5.258,-0.762 5.765,-1.269 IC1.3@5.975,-1.269 ; IC1.3 6.101,-0.224 6.452,0.127 7.595,0.127 8.001,-0.279 IC1.1 C1.2@8.001,-2.627
BTN_CANCEL: PB4.2 PB4.3 U1.E3 | length 38.3
  Top Layer w0.102: v2(10.61,18.766) 10.61,18.707 10.851,18.466 10.851,17.274 11.047,17.078
  Top Layer w0.254: PB4.2 -3.696,-1.31 -4.347,-1.31 -4.496,-1.161 -4.496,12.192 -1.397,15.291 10.871,15.291 11.138,15.558 11.138,16.987 11.047,17.078
  Top Layer w0.3: PB4.2 PB4.3
  Bottom Layer w0.102: v2(10.61,18.766) U1.E3
BTN_DOWN: PB2.2 PB2.3 U1.E1 | length 24.8
  Top Layer w0.254: v1(11.176,-1.372) v1@11.178,-1.373 ; PB2.2@12.367,-1.373 PB2.2
  Top Layer w0.3: v1@11.178,-1.373 PB2.2@12.367,-1.373 ; PB2.2 PB2.3
  MiddleLayer w0.254: v1(11.176,-1.372) 11.913,-0.635 v1(11.913,16.612)
  Bottom Layer w0.102: U1.E1 10.738,17.387 11.047,17.078
  Bottom Layer w0.254: 11.047,17.078 11.101,17.023 11.101,17.009 11.452,16.659 11.866,16.659 v1(11.913,16.612)
BTN_OK: PB1.2 PB1.3 U1.F3 | length 31.6
  Top Layer w0.102: v2(10.21,18.766) 10.21,17.476 10.243,17.443 10.243,17.264 10.429,17.078
  Top Layer w0.254: 10.429,17.078 10.661,16.845 v1(10.661,16.789)
  Top Layer w0.3: v1(11.303,3.785) 16.535,3.785 18.161,2.159 18.161,-0.152 19.384,-1.375 PB1.2 PB1.3
  MiddleLayer w0.254: v1(10.661,16.789) 10.694,16.789 11.455,16.027 11.455,4.445 11.35,4.34 11.35,3.832 v1(11.303,3.785)
  Bottom Layer w0.102: v2(10.21,18.766) U1.F3
BTN_UP: PB3.2 PB3.3 U1.E2 | length 27.8
  Top Layer w0.254: PB3.2 PB3.2@4.619,-1.375 ; v1(5.563,-2.413) v1@5.563,-2.319
  Top Layer w0.3: v1@5.563,-2.319 4.619,-1.375 PB3.3
  MiddleLayer w0.102: 9.712,17.078 10.61,17.976 v2(10.61,18.366)
  MiddleLayer w0.254: v1(5.563,-2.413) 5.817,-2.413 8.407,0.178 8.407,15.773 9.712,17.078
ERR_LED: R3.2 U1.D1 | length 14.8
  MiddleLayer w0.15: v2(11.151,17.551) 11.151,18.593 11.455,18.898 13.173,18.898
  MiddleLayer w0.254: 13.173,18.898 14.859,18.898 16.231,17.526 v1@16.231,11.303
  Bottom Layer w0.254: U1.D1 11.138,17.564 v2(11.151,17.551) ; v1(16.231,11.278) 16.467,11.514 17.111,11.514 17.409,11.812 R3.2
GND: C1.1 C2.1 C3.1 C4.1 C5.1 C6.1 C7.1 C8.1 C9.2 C10.1 C11.1 C12.2 C13.1 C14.1 C15.1 C16.1 C17.1 C19.1 C21.1 C22.1 C23.1 D1.1 D1.7 D1.8 D1.10 D1.11 D1.12 D1.29 D1.30 IC1.2 J1.5 J1.6 P1.3 PB1.1 PB1.4 PB2.1 PB2.4 PB3.1 PB3.4 PB4.1 PB4.4 R4.1 U1.A7 U1.C9 U1.D9 U1.E5 U1.E7 U1.E8 U1.H10 U2.2 Y1.2 Y1.4 | length 71.3
  Top Layer w0.102: v3(10.61,20.366) v3@10.619,20.357
  Top Layer w0.254: v1@20.369,2.411 v1(20.371,2.413)
  Top Layer w0.5: PB4.1 PB4.1@-3.381,1.372 ; J1.6@-2.75,3.625 -2.75,2.003 PB4.1@-3.381,1.372 ; PB4.4 PB4.1@-3.381,1.372 ; v1(2.718,1.092) 2.997,1.372 PB3.1 PB3.4 ; v4(10.389,1.372) PB2.1 PB2.4 ; v1@20.369,2.411 PB1.1 PB1.4
  Bottom Layer w0.102: v3(10.61,19.566) U1.E5 ; v3(10.61,20.366) U1.E7 ; v3(10.638,20.638) U1.E8 ; v3(11.01,21.166) U1.D9 ; v3(11.41,21.166) U1.C9 ; U1.A7 12.341,20.241 12.57,20.241 v3(12.573,20.244)
  Bottom Layer w0.254: C11.1@-0.573,24.74 C11.1 ; C9.2 -0.599,26.111 -0.653,26.111 -0.653,28.15 -0.127,28.676 D1.30 D1.29 ; v1(2.718,1.092) 2.743,1.092 3.048,1.397 U2.2 ; C2.1 v1(5.563,-3.683) ; C23.1@5.675,20.828 C23.1 ; C5.1@6.31,3.429 C5.1 C5.1@6.361,3.48 ; IC1.2 7.051,-2.195 v1(5.563,-3.683) ; C6.1@7.224,23.597 C6.1 7.364,23.457 Y1.2 ; C1.1@8.001,-3.977 5.923,-3.977 5.629,-3.683 v1(5.563,-3.683) ; U1.H10 9.538,21.836 v3(9.709,22.007) ; C17.1 10.085,12.588 9.572,13.1 9.572,13.313 v1(9.525,13.36) 9.572,13.407 9.572,13.519 10.11,14.057 C16.1 ; Y1.4 12.829,25.057 C8.1 ; D1.12 D1.11 ; v1(13.157,32.436) 13.173,32.42 D1.11 ; D1.10 D1.11 ; v1(15.621,32.334) 15.346,32.059 15.346,30.299 D1.8 D1.7 ; C12.2 C12.2@16.042,25.193 ; C21.1 v1(16.967,17.78) ; C13.1 C13.1@16.093,19.99 ; D1.1 20.955,30.226 v1(20.98,30.251)
  Bottom Layer w0.35: v1(5.182,5.385) 5.486,5.08 C4.1 ; v1(5.283,3.429) C5.1@6.31,3.429
  Bottom Layer w0.5: v1(-1.753,23.368) R4.1 ; v1@-1.727,24.74 C11.1@-0.573,24.74 ; v1@-1.727,26.111 C9.2@-0.653,26.111 ; J1.5 0.817,1.317 1.009,1.509 1.009,3.157 v1(0.965,3.2) ; C14.1 0.66,11.622 1.843,11.622 v1(1.88,11.659) ; v1@1.923,-0.762 C3.1 ; C7.1 2.337,8.981 v1(2.337,9.83) ; v1(4.572,18.161) C22.1 ; v1(4.572,19.558) C15.1 ; v1(4.572,20.828) C23.1@5.675,20.828 ; v1(6.274,23.597) C6.1@7.224,23.597 ; C8.1 v1(12.954,25.883) ; v1(14.605,24.232) C10.1 ; v1(16.002,24.257) C12.2 ; C19.1 16.067,21.361 v1(16.942,21.361) ; C13.1@16.093,19.99 v1(16.967,19.99)
  other v1: 1.922,-0.762 0.965,1.509 0.965,2.297 -1.753,24.74 -1.753,26.111
LCD_CS: D1.13 U1.J9 | length 13.2
  Top Layer w0.254: v1(8.255,22.403) 8.255,26.255 8.822,26.822 11.836,26.822 12.294,27.28 v1(12.294,27.762)
  Bottom Layer w0.102: 8.516,22.142 8.696,21.961 8.696,21.479 U1.J9
  Bottom Layer w0.254: v1(8.255,22.403) 8.516,22.142 ; D1.13 11.846,30.153 11.846,28.21 v1(12.294,27.762)
LCD_DC: D1.15 U1.J10 | length 9.3
  Bottom Layer w0.102: U1.J10 9.138,21.939 9.341,22.142
  Bottom Layer w0.254: 9.341,22.142 10.211,23.012 10.211,27.661 10.373,27.823 D1.15
LCD_RES: D1.14 U1.H9 | length 10
  MiddleLayer w0.102: 9.384,22.142 9.384,21.191 v2(9.439,21.136)
  MiddleLayer w0.254: 9.384,22.142 9.384,22.152 10.922,23.69 10.922,27.483 v1(11.125,27.686)
  Bottom Layer w0.102: v2(9.439,21.136) U1.H9
  Bottom Layer w0.254: D1.14 11.073,27.738 v1(11.125,27.686)
LCD_SCK: D1.18 U1.G8 | length 11.2
  MiddleLayer w0.102: 8.359,21.624 9.217,20.766 v2(9.81,20.766)
  MiddleLayer w0.254: v1(8.28,27.508) 8.255,27.483 8.255,27.33 7.569,26.645 7.569,22.414 8.359,21.624
  Bottom Layer w0.102: v2(9.81,20.766) U1.G8
  Bottom Layer w0.254: D1.18 8.277,30.222 8.277,27.512 v1(8.28,27.508)
LCD_SDIN: D1.19 U1.J8 | length 12.4
  Bottom Layer w0.102: 8.359,21.417 U1.J8
  Bottom Layer w0.254: D1.19 7.544,30.197 7.544,27.838 5.74,26.035 5.74,22.86 6.299,22.301 7.163,22.301 7.417,22.047 7.728,22.047 8.359,21.417
NetC6_2: C6.2 U1.F9 Y1.3 | length 8.4
  Top Layer w0.102: 9.234,22.142 9.872,21.503 v2(10.24,21.136)
  Top Layer w0.254: v1(9.068,26.06) 9.068,22.308 9.234,22.142
  Bottom Layer w0.102: v2(10.24,21.136) U1.F9
  Bottom Layer w0.254: C6.2 8.935,24.932 Y1.3 9.068,25.065 v1(9.068,26.06)
NetC8_2: C8.2 U1.F10 Y1.1 | length 4.4
  Bottom Layer w0.2: U1.F10 10.342,21.441 10.342,21.569 10.757,21.983 11.087,21.983 11.245,22.142
  Bottom Layer w0.254: 11.245,22.142 11.354,22.25 11.354,23.363 Y1.1 11.385,23.582 C8.2
NetC9_1: C9.1 D1.28 | length 4.3
  Bottom Layer w0.254: C9.1 0.802,26.212 1.273,26.683 D1.28
NetC11_2: C11.2 D1.27 | length 6.3
  Bottom Layer w0.254: C11.2 1.372,24.765 1.973,25.366 D1.27
NetC16_2: C16.2 U1.F4 | length 4.5
  Top Layer w0.102: 9.703,17.078 9.703,18.923 9.946,19.166 v2(10.21,19.166)
  Top Layer w0.254: 9.703,17.078 9.703,16.739 10.133,16.309 v1(10.133,16.256)
  Bottom Layer w0.102: v2(10.21,19.166) U1.F4
  Bottom Layer w0.254: v1(10.133,16.256) 10.133,15.434 C16.2
NetC17_2: C17.2 U1.B1 | length 10.7
  Top Layer w0.102: v2(11.815,17.954) 12.691,17.078
  Top Layer w0.254: v1(10.135,10.084) 12.827,12.776 12.827,16.942 12.691,17.078
  Bottom Layer w0.102: v2(11.815,17.954) 11.819,17.954 11.935,17.838 U1.B1
  Bottom Layer w0.254: v1(10.135,10.084) C17.2
NetC18_1: C18.1 D1.4 | length 5.8
  Bottom Layer w0.254: C18.1 17.722,25.556 18.139,25.556 18.39,25.806 18.39,27.686 18.085,27.991 18.085,30.214 D1.4
NetC18_2: C18.2 D1.5 | length 3.7
  Bottom Layer w0.254: D1.5 17.373,26.609 C18.2
NetC20_1: C20.1 D1.2 | length 4.7
  Bottom Layer w0.254: D1.2 19.473,27.136 19.99,26.619 20.792,26.619 C20.1
NetC20_2: C20.2 D1.3 | length 6.3
  Bottom Layer w0.254: D1.3 18.773,26.515 20.041,25.248 20.813,25.248 C20.2
NetD1_26: D1.26 R4.2 | length 8.3
  Bottom Layer w0.254: R4.2 1.753,23.368 2.673,24.288 D1.26
NetD2_2: D2.2 R3.1 | length 3.5
  Top Layer w0.254: v1@19.97,11.893 v1(20.015,11.938)
  Top Layer w0.3: D2.2@19.97,9.779 v1@19.97,11.893
  Bottom Layer w0.254: R3.1 18.786,11.938 v1(20.015,11.938)
NetJ1_2: J1.2 U2.1 | length 5.8
  Bottom Layer w0.254: J1.2@-0.073,-0.635 1.346,-0.635 1.381,-0.6 2.591,0.61 3.226,0.61 3.998,1.382 U2.1
NetJ1_3: J1.3 U2.3 | length 3.8
  Bottom Layer w0.254: J1.3@-0.1,0.042 -0.058,0 0.889,0 2.098,1.209 U2.3
NRST: C7.2 P1.1 R2.1 U1.G10 | length 33.4
  Top Layer w0.3: v1(7.722,8.738) 11.913,8.738 14.502,11.327 14.502,21.185 13.36,22.327 v5(10.389,22.327)
  Bottom Layer w0.102: U1.G10 9.938,21.814 v5@10.265,22.142
  Bottom Layer w0.254: P1.1 -0.162,6.858 0.585,7.605 R2.1 0.66,7.58 C7.2 2.524,7.818 3.018,7.818 3.938,8.738 v1(7.722,8.738) ; v5@10.265,22.142 10.389,22.265 v5(10.389,22.327)
SWCLK: P1.2 U1.A2 | length 30.6
  Top Layer w0.3: P1.2 -2.765,6.829 -2.765,6.143 -1.422,4.801 10.947,4.801 v1(12.903,6.756)
  MiddleLayer w0.254: v1(12.903,6.756) 13.237,6.756 13.386,6.905 v1(13.386,18.11)
  Bottom Layer w0.102: U1.A2 v1@13.173,18.238
  Bottom Layer w0.254: v1@13.173,18.238 13.258,18.238 v1(13.386,18.11)
SWDIO: P1.4 U1.D4 | length 24
  MiddleLayer w0.102: 10.245,17.078 10.851,17.684 10.851,19.007 v2(11.01,19.166)
  MiddleLayer w0.254: v1(8.915,11.633) 8.915,15.748 10.245,17.078
  Bottom Layer w0.102: v2(11.01,19.166) U1.D4
  Bottom Layer w0.254: P1.4 -2.794,10.587 -0.781,12.6 2.67,12.6 3.637,11.633 v1(8.915,11.633)
USB_DM: U1.C1 U2.6 | length 23
  Bottom Layer w0.102: U1.C1 11.846,17.53 12.188,17.53 12.64,17.078
  Bottom Layer w0.254: U2.6 4.024,4.605 4.024,6.285 4.611,6.872 9.539,6.872 10.248,7.581 10.697,8.03 10.907,8.03 11.162,7.775 11.305,7.775 11.521,7.991 11.521,8.135 11.139,8.516 11.139,8.66 11.355,8.876 11.499,8.876 11.88,8.494 12.024,8.494 12.239,8.709 12.239,8.853 11.985,9.108 11.985,9.318 12.673,10.006 13.125,10.458 13.125,16.593 12.64,17.078
USB_DP: U1.C2 U2.4 | length 22.4
  MiddleLayer w0.102: v2(11.416,18.354) 11.415,17.415 11.559,17.272 12.14,17.272 12.335,17.078
  MiddleLayer w0.254: 12.335,17.078 12.445,16.967 12.445,16.95 12.446,10.864 12.501,10.809 12.501,10.639 v1(12.548,10.592)
  Bottom Layer w0.102: v2(11.416,18.354) 11.419,18.354 11.535,18.238 U1.C2
  Bottom Layer w0.254: U2.4 2.108,4.589 2.108,5.74 3.594,7.226 9.182,7.226 v1(12.548,10.592)
VBUS: C2.2 J1.1 R1.1 U2.5 | length 15.4
  MiddleLayer w0.254: v1(1.753,-2.159) 1.753,-1.491 1.422,-1.161 1.422,1.006 2.667,2.25 2.667,5.41 v1(3.2,5.944)
  Bottom Layer w0.254: J1.1@-0.1,-1.258 0.45,-1.258 1.304,-2.112 1.706,-2.112 v1(1.753,-2.159) ; R1.1@3.008,-2.184 R1.1 ; U2.5 3.048,5.791 v1(3.2,5.944)
  Bottom Layer w0.35: C2.2 R1.1@3.008,-2.184
  Bottom Layer w0.4: v1(1.753,-2.159) R1.1
pads on no net: D1.16 D1.17 D1.20 D1.21 D1.22 D1.23 D1.24 D1.25 IC1.4 J1.4 U1.A3 U1.A4 U1.A5 U1.A6 U1.A9 U1.B2 U1.B3 U1.B4 U1.B5 U1.B6 U1.B7 U1.B9 U1.B10 U1.C3 U1.C4 U1.C5 U1.C6 U1.C7 U1.C8 U1.C10 U1.D2 U1.D3 U1.D5 U1.D6 U1.D7 U1.D8 U1.D10 U1.E9 U1.E10 U1.F1 U1.F2 U1.F5 U1.F6 U1.F8 U1.G1 U1.G2 U1.G3 U1.G4 U1.G5 U1.G6 U1.G7 U1.H1 U1.H2 U1.H3 U1.H4 U1.H5 U1.H6 U1.H7 U1.H8 U1.J1 U1.J2 U1.J3 U1.J4 U1.J5 U1.J6 U1.J7

## Polygon pours and split planes (outlines as drawn)
GND on Int1 (GND) "GND_L02_P000" (solid, remove dead copper, pour order 0): -4.978,35.001 -4.978,-5.004 25.019,-5.004 25.019,35.001 21.006,35.001 21.006,34.188 -0.965,34.188 -0.965,35.001
3V3 on MiddleLayer "3V3_L03_P001" (solid, remove dead copper, pour order 1): -4.98,-5 -4.98,35 -0.98,35 -0.98,34.195 -0.959,34.174 21.012,34.174 21.012,34.992 21.02,35 25.02,35 25.02,-5

## Keep-outs
Keep-Out Layer:
  circle w0.013: c-3.48,11.4 r0.6
  circle w0.013: c23.52,11.4 r0.6
  lines w0.1: 21.012,34.992 21.012,34.174 -0.959,34.174 -0.98,34.195 -0.98,35 -4.98,35 -4.98,-5 25.02,-5 25.02,35 21.02,35

## Silkscreen, mask and mechanical layers (free items; w line width, h text height)
Top Overlay:
  drawing of 14 lines, arcs and shapes, not listed
  text "Prokey.io" at 4.293,17.678 h1.52
  text "V5.0" at 17.856,13.005 h1.52
Bottom Overlay:
  drawing of 2 lines, arcs and shapes, not listed
Mechanical 1:
  lines w0.013: -5.05,-3.532 -4.98,-3.532 ; -5.05,-3.062 -4.98,-3.062 ; -5.05,-2.48 -4.98,-2.48 ; -5.05,2.48 -4.98,2.48 ; -5.05,3.062 -4.98,3.062 ; -5.05,3.532 -4.98,3.532 ; -4.98,-3.75 -5.05,-3.75 -5.05,3.75 -4.98,3.75
Mechanical 5:
  circle w0.013: c22.02,0 r0.48
  circle w0.013: c14.02,0 r0.48
  circle w0.013: c6.02,0 r0.48
  circle w0.013: c-1.98,0 r0.48
  circle w0.006: c-4.98,35 r0.003
  circle w0.006: c25.02,35 r0.003
  circle w0.006: c25.02,-5 r0.003
  circle w0.006: c25.02,35 r0.003
  lines w0.013: -3.48,-1.323 ccw(c-1.98,0) -0.48,-1.323 -0.48,1.323 ccw(c-1.98,0) -3.48,1.323 -3.48,-1.323 ; 4.52,-1.323 ccw(c6.02,0) 7.52,-1.323 7.52,1.323 ccw(c6.02,0) 4.52,1.323 4.52,-1.323 ; 12.52,-1.323 ccw(c14.02,0) 15.52,-1.323 15.52,1.323 ccw(c14.02,0) 12.52,1.323 12.52,-1.323 ; 20.52,-1.323 ccw(c22.02,0) 23.52,-1.323 23.52,1.323 ccw(c22.02,0) 20.52,1.323 20.52,-1.323
  lines w0.04: -4.98,-5 -4.98,-3.75 ; -0.4,-2.52 -0.4,-3.75 -5.05,-3.75 -5.05,3.75 -0.4,3.75 -0.4,2.52 ; 0,-2.8 0,2.8 ; 0,-1.425 0.22,-1.425 0.22,-1.175 0,-1.175 ; 0,-0.775 0.22,-0.775 0.22,-0.525 0,-0.525 ; 0,-0.125 0.22,-0.125 0.22,0.125 0,0.125 ; 0,0.525 0.22,0.525 0.22,0.775 0,0.775 ; 0,1.175 0.22,1.175 0.22,1.425 0,1.425
  lines w0.1: 9.271,-4.953 9.271,9.472 25.071,9.472 ; -3.33,15.3 23.37,15.3 23.37,34.5 -3.33,34.5 -3.33,15.3

## Text inside footprints (layer, text, board x,y; h text height)
P1: Top Overlay "5" at -1.016,10.658 h1 r90; Top Overlay "1" at -1.016,5.258 h1 r90